# EAGLE board asynclabs_wishield_v2 (EAGLE 5.06)
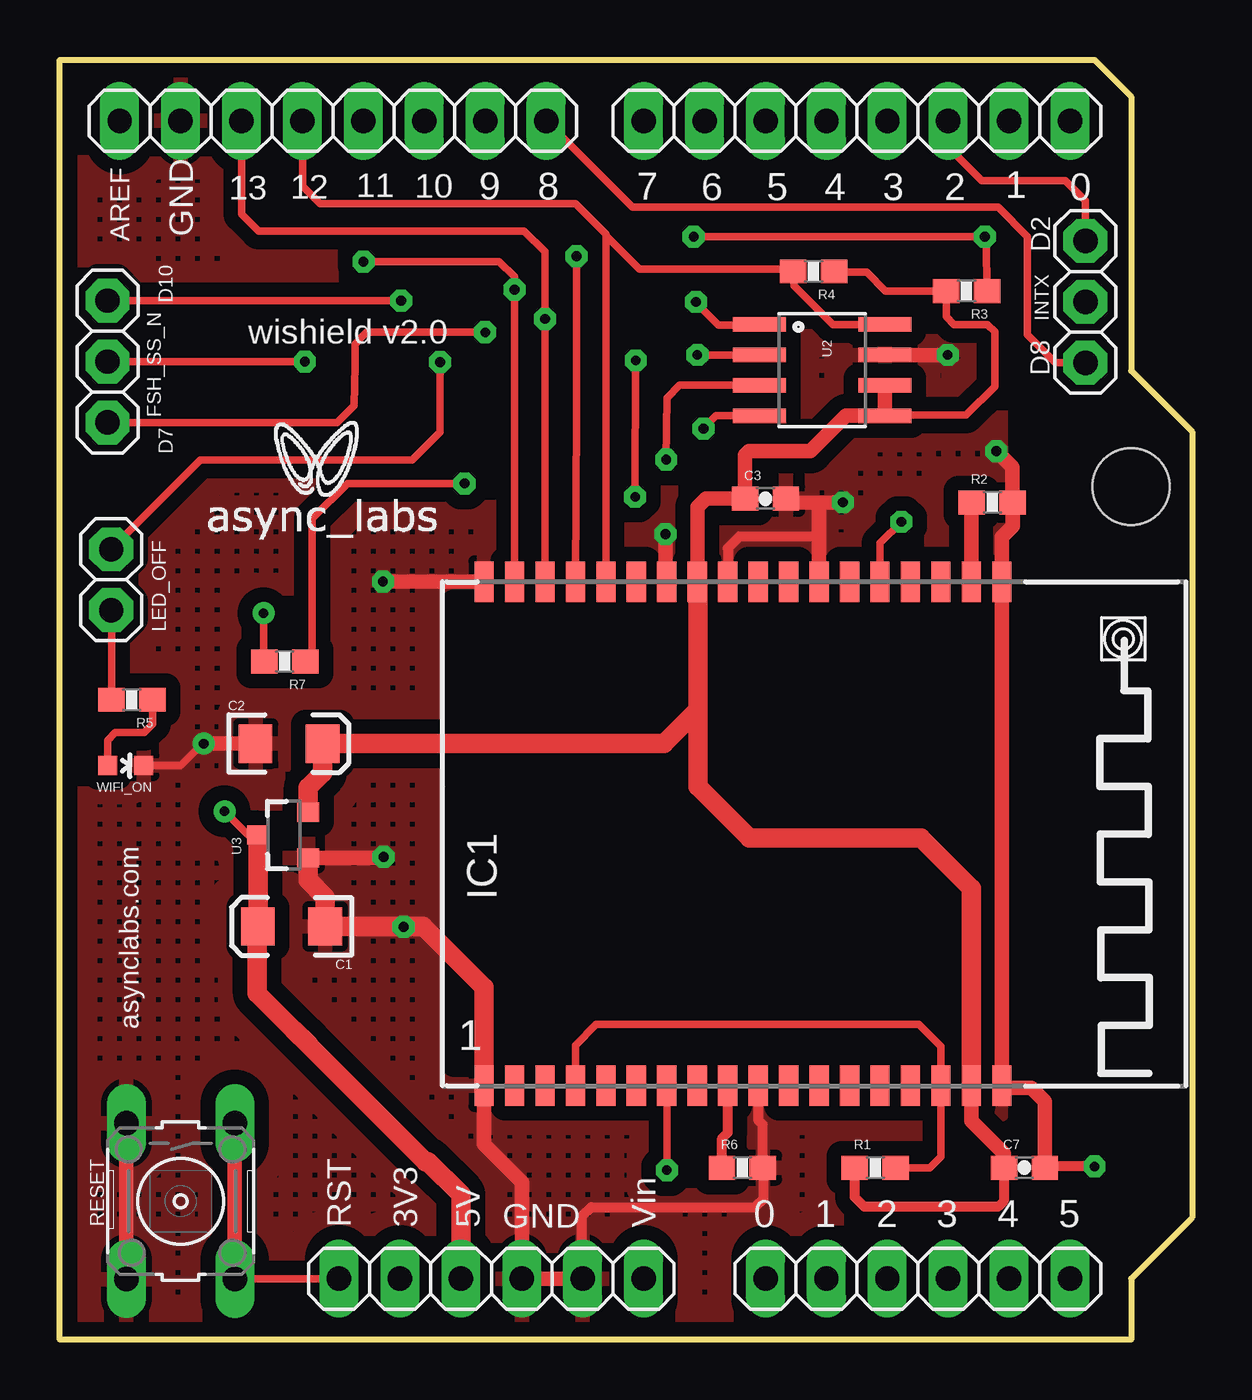
[diagram p0: board, top side]
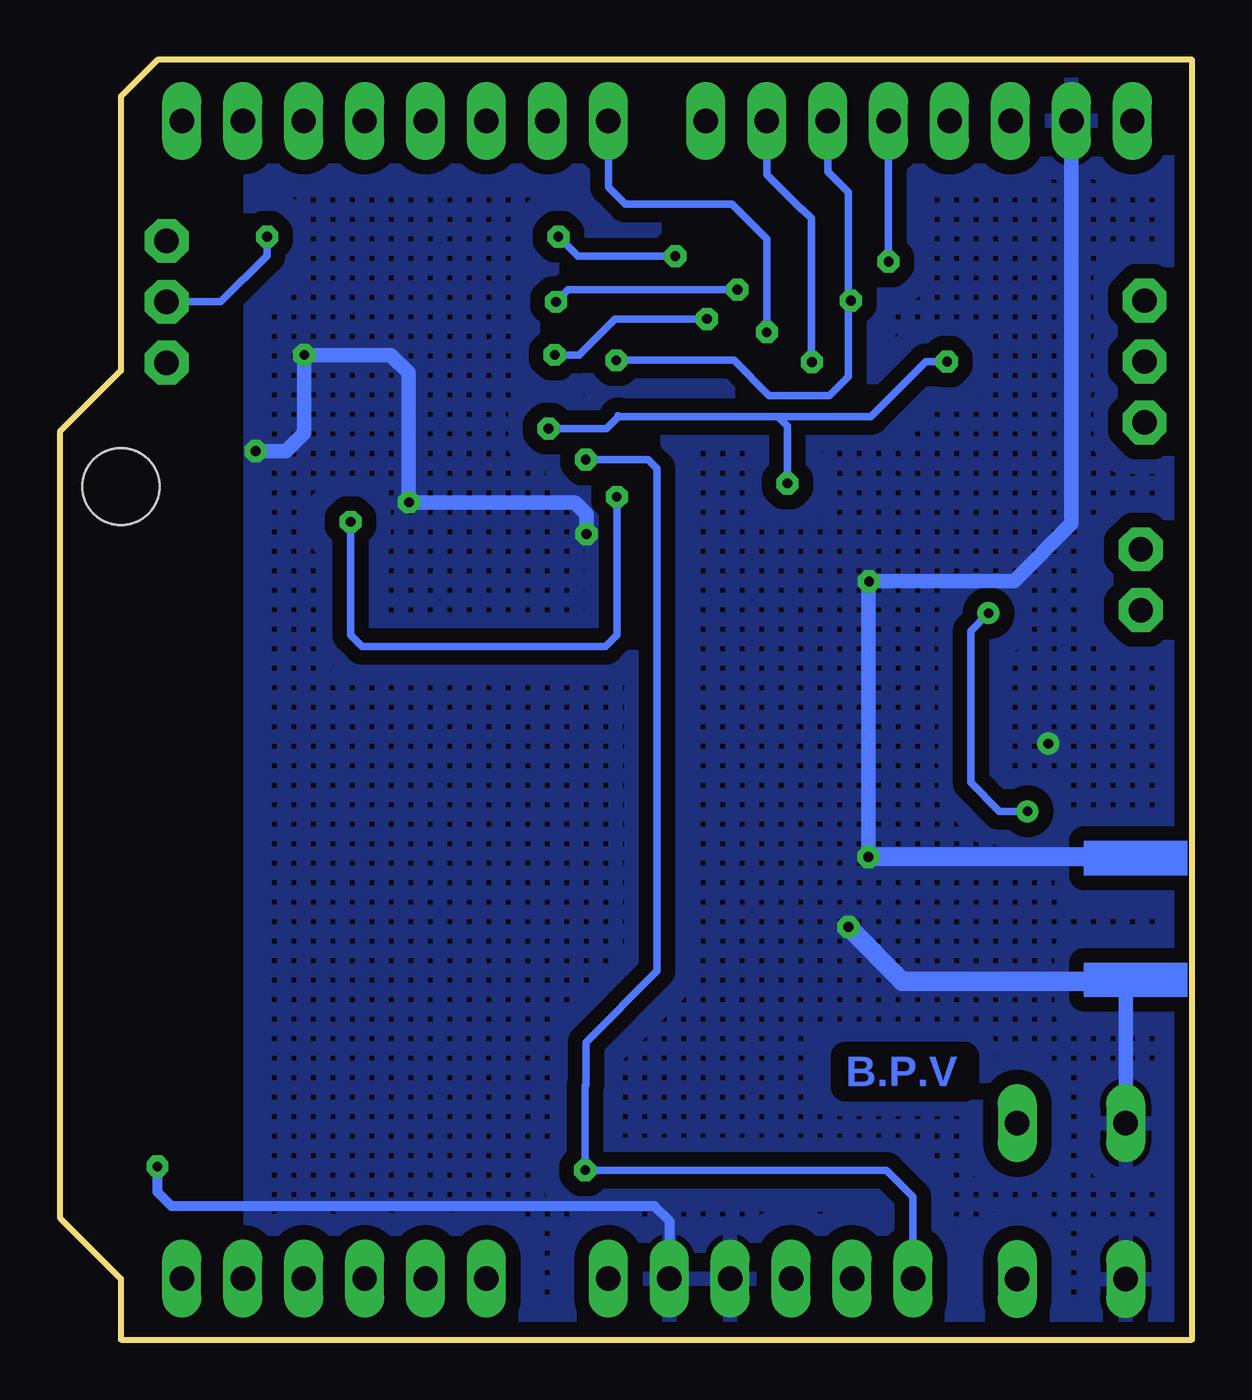
[diagram p1: board, bottom side, seen from below]

Size 47.19 x 53.34 mm. Coordinates in mm from the lower left corner, seen from the top.
Outline: 0,53.34 43.13,53.34 44.65,51.82 44.65,40.39 47.19,37.85 47.19,5.08 44.65,2.54 44.65,0 0,0 0,53.34
Copper layers (1*16): Top 0.035mm / dielectric 1.5mm / Bottom 0.035mm
Design rules "SparkFun *": minimum track width 8mil, minimum drill 16mil, track to track 8mil, track to pad 8mil, pad to pad 8mil, via to via 8mil, smd to smd 8mil, copper to edge 10mil, drill to drill 8mil, minimum pad ring 12mil, minimum via ring 10mil, stop-mask expansion 4mil, vias tented up to drill 25mil, thermal gap 10mil
Holes 3.2 mm at 44.65,35.56
tKeepout: area 39.9,30.7 to 46.8,31.7; area 39.8,10.4 to 46.8,11.5
tRestrict: area 16.5,11.6 to 47.2,30.7

## Footprints (pad centres in the part's own frame; a part is rotated, then mirrored left to right if it is on the bottom)
EIA3216 = smd 1.4 x 1.6: A 1.4,0; C -1.4,0
0603-CAP = smd 1.1 x 1: 1 -0.85,0; 2 0.85,0
ZG2100MOD = smd 0.8 x 1.7: CE_N 6.63,10.12; GND1 -13.69,-10.88; GND10 -2.26,-10.88; GND16 5.36,-10.88; GND18 7.9,-10.88; GND19 7.9,10.12; GND25 0.28,10.12; GND28 -3.53,10.12; GND30 -6.07,10.12; GND36 -13.69,10.12; INTX -9.88,10.12; JRST -3.53,-10.88; NC8 -4.8,-10.88; NC12 0.28,-10.88; NC13 1.55,-10.88; NC14 2.82,-10.88; NC15 4.09,-10.88; NC21 5.36,10.12; NC22 4.09,10.12; RESETN -6.07,-10.88; SCK -11.15,10.12; SDI -12.42,10.12; SDO -8.61,10.12; SS_N 2.82,10.12; TCK -9.88,-10.88; TDI -7.34,-10.88; TDO -11.15,-10.88; TMS -8.61,-10.88; UART_RX -0.99,10.12; UART_TX -2.26,10.12; VDD18_2 -12.42,-10.88; VDD18_11 -0.99,-10.88; VDD18_24 1.55,10.12; VDD18_31 -7.34,10.12; VDD33_17 6.63,-10.88; VDD33_29 -4.8,10.12
PINHD3 = drill 1.016 pad 1.829 octagon: 1 -2.54,0; 2 0,0; 3 2.54,0
PINHD2 = drill 1.016 pad 1.829 octagon: 1 -1.27,0; 2 1.27,0
0603-RES = smd 1.1 x 1: 1 -0.85,0; 2 0.85,0
SWITCH = drill 1.016 long: 1 -3.251,2.261; 2 3.251,2.261; 3 -3.251,-2.261; 4 3.251,-2.261
SO08 = smd 0.61 x 2.21: 1 -1.905,-2.616; 2 -0.635,-2.616; 3 0.635,-2.616; 4 1.905,-2.616; 5 1.905,2.616; 6 0.635,2.616; 7 -0.635,2.616; 8 -1.905,2.616
SOT23-3 = smd 0.8 x 0.9: 1 -0.95,-1; 2 0.95,-1; 3 0,1.1
1X06 = drill 1.016 long: 1 -6.35,0; 2 -3.81,0; 3 -1.27,0; 4 1.27,0; 5 3.81,0; 6 6.35,0
1X08 = drill 1.016 long: 1 -8.89,0; 2 -6.35,0; 3 -3.81,0; 4 -1.27,0; 5 1.27,0; 6 3.81,0; 7 6.35,0; 8 8.89,0
LED-0603 = smd 0.8 x 0.8: A 0,-0.75; C 0,0.75

## Placement (x,y rotation side)
C1  10uF  [EIA3216]  9.65,17.22 180 top
C2  10uF  [EIA3216]  9.55,24.84 0 top
C3  100nF  [0603-CAP]  29.41,35.05 0 top
C7  100nF  [0603-CAP]  40.21,7.16 0 top
IC1  802.11  [ZG2100MOD]  31.37,21.46 0 top
INTX  [PINHD3]  42.75,43.26 90 top
JP3  [PINHD2]  2.13,31.67 270 top
JP4  [PINHD3]  1.98,40.77 270 top
R1  4.7k  [0603-RES]  33.99,7.16 0 top
R2  4.7k  [0603-RES]  38.86,34.9 0 top
R3  4.7k  [0603-RES]  37.8,43.71 180 top
R4  4.7k  [0603-RES]  31.42,44.53 180 top
R5  330  [0603-RES]  3,26.67 180 top
R6  4.7k  [0603-RES]  28.45,7.16 0 top
R7  4.7k  [0603-RES]  9.37,28.27 180 top
RESET  SWITCH  [SWITCH]  5.03,5.77 270 top
U2  [SO08]  31.78,40.41 270 top
U3  MCP1700_SOT23  [SOT23-3]  9.35,21.03 90 top
U$1  POWER  [1X06]  17.98,2.54 0 top
U$2  ANALOG  [1X06]  35.76,2.54 0 top
U$3  DIGITAL_0_7  [1X08]  33.22,50.8 0 top
U$4  DIGITAL_8_13  [1X08]  11.38,50.8 0 top
WIFI_ON  red  [LED-0603]  2.74,23.93 270 top

## Library data of the parts
C1-C3 C7 R1-R7 RESET U2 U3 WIFI_ON = asynlabs
IC1 INTX JP3 JP4 = ZGLIB
U$1-U$4 = arduino

## Nets
+3V3: C2.A C3.1 C7.1 IC1.VDD33_17 IC1.VDD33_29 R1.1 R3.2 R4.1 U2.5 U2.6 U3.2
+5V: C1.A R7.2 U3.3 U$1.3
CE_N: IC1.CE_N R2.1
D2: INTX.3 U$3.6
D7: JP4.3 U$3.1
D8: INTX.1 U$4.8
DIG9: JP3.1 U$4.7
FLASH_SS_N: JP4.2 R7.1 U2.4
GND: C1.C C2.C C3.2 C7.2 IC1.GND1 IC1.GND10 IC1.GND18 IC1.GND19 IC1.GND25 IC1.GND28 IC1.GND30 IC1.GND36 R2.2 R6.2 RESET.3 RESET.4 U2.7 U3.1 U$1.4 U$1.5 U$4.2 WIFI_ON.C
INTX: IC1.INTX INTX.2 R3.1
JRST: IC1.JRST R6.1
N$1: JP3.2 R5.2
N$2: R5.1 WIFI_ON.A
RST: IC1.RESETN RESET.1 RESET.2 U2.3 U$1.1
SCK: IC1.SCK U2.2 U$4.3
SDI: IC1.SDI U2.1 U$4.5
SDO: IC1.SDO R4.2 U2.8 U$4.4
SS_N: IC1.SS_N JP4.1 U$4.6
VDD_TIE: IC1.GND16 IC1.TCK R1.2

## Tracks (layer width: path | path; a pad name or v marks a point on that pad's centre or on a via)
+3V3
  Top 0.305: U2.5 34.42,38.53 37.77,38.53 38.96,39.73 38.96,42.01 38.66,42.32 37.26,42.32 36.95,42.63 R3.2 34.42,43.71 33.63,44.5 32.3,44.5 R4.1
  Top 0.406: R1.1 33.14,5.93 33.53,5.54 39.12,5.54 39.34,5.77 C7.1
  Top 0.61: IC1.VDD33_17 38,9.12 39.36,7.76 C7.1 | 26.59,31.56 IC1.VDD33_29 26.57,34.7 26.92,35.05 C3.1 28.56,36.87 28.73,37.03 31.29,37.03 32.77,38.51 U2.5 U2.6
  Top 0.813: IC1.VDD33_17 38,18.8 35.89,20.9 28.75,20.9 26.59,23.06 26.59,26.26 | 26.59,26.26 26.59,31.56 | 26.59,26.26 25.17,24.84 C2.A 10.95,23.62 10.35,23.02 U3.2
+5V  (via drill 0.41)
  Top 0.203: 8.48,28.25 8.51,28.27 R7.2
  Top 0.305: v8.48,30.28 8.48,28.25 | U3.3 7.85,21.03 v6.86,22.02
  Top 0.813: U$1.3 16.71,6.05 15.34,7.42 15.24,7.42 9.74,12.92 | 9.74,12.92 8.23,14.43 8.23,17.2 C1.A U3.3 | 9.74,12.92 10.36,12.29
  Bottom 0.305: v6.86,22.02 8.03,22.02 9.22,23.22 9.22,29.54 v8.48,30.28
CE_N
  Top 0.61: IC1.CE_N 38,34.89 R2.1
D2
  Top 0.305: 37.03,49.71 38.43,48.31 41.91,48.31 42.75,47.47 INTX.3
  Top 0.61: 37.03,49.71 U$3.6
D7  (via drill 0.41)
  Top 0.305: JP4.3 11.56,38.23 12.27,38.94 12.29,40.61 12.29,41.5 12.78,41.99 v17.73,41.99
  Bottom 0.305: 24.33,49.71 24.33,49.23 | 24.33,49.71 U$3.1 | 24.33,49.71 24.33,48.03 23.62,47.32 19.18,47.32 17.73,45.87 v17.73,41.99
D8
  Top 0.305: INTX.1 41.5,40.72 40.34,41.88 40.34,45.97 39.12,47.19 23.88,47.19 U$4.8
DIG9  (via drill 0.41)
  Top 0.305: v15.85,40.74 15.85,37.82 14.68,36.65 5.84,36.65 JP3.1
  Bottom 0.305: U$4.7 17.73,48.57 16.28,47.12 16.26,47.12 15.88,46.74 15.88,40.77 v15.85,40.74
FLASH_SS_N  (via drill 0.41)
  Top 0.203: 10.52,28.55 10.24,28.27 R7.1
  Top 0.305: v10.21,40.77 JP4.2 | U2.4 27.36,38.51 v26.82,37.97 | 10.52,28.55 10.52,34.21 11.99,35.69 v16.87,35.69
  Bottom 0.305: v10.21,40.77 11.1,40.77 13.39,38.48 17.27,38.48 | 17.27,38.48 23.9,38.48 | 23.9,38.48 23.93,38.51 | v26.82,37.97 24.41,37.97 23.9,38.48 | v16.87,35.69 16.87,38.07 17.27,38.48
GND  (via drill 0.41)
  Top 0.305: WIFI_ON.C 5.03,23.93 5.97,24.87 8.13,24.87 C2.C | v13.46,31.6 13.44,31.62
  Top 0.406: R6.2 29.3,8.95 29.11,9.14 IC1.GND10 | 29.34,7.12 29.34,5.87 28.98,5.51 22.15,5.51 21.77,5.13 21.77,2.57 | IC1.GND18 40.45,10.58 41.05,9.98 41.05,7.21 v43.13,7.21 | IC1.GND30 | IC1.GND28 27.84,32.99 28.32,33.48 31.44,33.48 31.65,33.17
  Top 0.61: IC1.GND10 | C7.2 41.06,9.92 40.49,10.49 39.36,10.49 IC1.GND18 IC1.GND19 39.27,33.45 39.73,33.91 39.73,34.89 R2.2 39.71,36.36 v39.04,37.03 | 29.34,7.12 R6.2 | 21.77,2.57 U$1.5 U$1.4 19.25,6.55 17.68,8.13 IC1.GND1 | RESET.4 RESET.3 | 31.65,34.9 31.65,33.17 IC1.GND25 | 31.65,34.9 | 31.52,34.9 31.65,34.9 | 31.52,34.9 30.26,34.9 C3.2 | v37.01,41.05 U2.7 | v32.64,34.9 31.52,34.9 | 12.42,17.22 14.22,17.22 | U3.1 13.45,20.08 v13.49,20.12 | v13.46,31.6 17.66,31.6 IC1.GND36 | C2.C v5.99,24.84 | v25.25,33.58 25.25,31.63 IC1.GND30 | v14.33,17.2 14.53,17.2 14.55,17.22
  Top 0.813: 12.42,17.22 C1.C 11.05,18.44 10.34,19.15 U3.1 | 12.42,17.22 14.1,17.22 | IC1.GND1 17.68,14.68 15.14,17.22 14.55,17.22 12.42,17.22
  Bottom 0.406: v43.13,7.21 43.13,6.15 42.55,5.56 22.4,5.56 21.77,4.93 21.77,2.57 U$1.5
  Bottom 0.61: U$1.5 21.77,2.54 | v39.04,37.03 37.77,37.03 37.01,37.8 v37.01,41.05 33.4,41.05 32.66,40.31 32.66,34.93 v32.64,34.9 25.73,34.9 25.25,34.42 v25.25,33.58 | v13.49,20.12 13.49,31.57 v13.46,31.6 13.44,31.62 7.42,31.62 5.03,34.01 U$4.2 | RESET.3 2.77,14.94
  Bottom 0.813: v13.49,20.12 3.15,20.14 | 2.77,14.94 12.07,14.94 v14.33,17.2
  pour Bottom (isolate 0.61, hatched): 0.08,53.39 39.24,53.39 39.24,0.1 0.08,0.1 0.08,2.26 0,2.26 0,53.47
  pour Top (isolate 0.61, hatched): 0.05,53.37 39.22,53.37 39.22,0.08 0.05,0.08 0.05,2.24 -0.03,2.24 -0.03,53.44
INTX  (via drill 0.41)
  Top 0.305: IC1.INTX 21.54,38.61 v21.54,45.16 | R3.1 38.62,45.71 v38.56,45.97 v26.42,45.97
  Bottom 0.305: v21.54,45.16 25.6,45.16 v26.42,45.97 | v38.56,45.97 38.56,45.19 40.49,43.26 INTX.2
JRST
  Top 0.406: R6.1 27.6,8.4 27.84,8.64 IC1.JRST
  Top 0.61: IC1.JRST
N$1
  Top 0.305: R5.2 2.15,30.39 JP3.2
N$2
  Top 0.305: WIFI_ON.A 1.99,24.98 2.31,25.3 3.51,25.3 3.86,25.65 3.86,26.66 R5.1
RST  (via drill 0.41)
  Top 0.305: U$1.1 7.32,2.54 RESET.2 | v25.3,7.06 IC1.RESETN | v25.27,36.68 25.3,39.24 25.83,39.78 U2.3 | 29.34,39.78 29.97,39.78 30,39.8
  Top 0.406: U2.3 29.34,39.78
  Top 0.61: RESET.2 RESET.1
  Bottom 0.305: U$1.1 11.63,5.94 12.75,7.06 v25.3,7.06 | v25.3,7.06 25.3,10.59 | v25.3,7.06 IC1.RESETN 25.27,10.61 25.27,12.4 22.3,15.37 22.3,36.3 22.68,36.68 v25.27,36.68
SCK  (via drill 0.41)
  Top 0.305: IC1.SCK v20.22,42.55 20.22,45.34 19.36,46.2 8.28,46.2 7.57,46.91 U$4.3 | v26.57,41.05 U2.2
  Bottom 0.305: v20.22,42.55 24.05,42.55 25.55,41.05 v26.57,41.05
SDI  (via drill 0.41)
  Top 0.305: IC1.SDI 18.95,44.3 | 18.95,44.3 18.31,44.93 v12.65,44.93 | 18.95,44.3 v18.95,43.77 v18.95,43.76 | v26.52,43.26 26.52,43.23 27.46,42.29 29.13,42.29 U2.1
  Bottom 0.305: v12.65,44.93 U$4.5 | v18.95,43.76 26.01,43.76 v26.52,43.26
SDO
  Top 0.305: IC1.SDO 22.76,46.08 | 22.76,46.08 21.49,47.35 10.85,47.35 10.11,48.08 U$4.4 | 22.76,46.08 22.76,46.03 24.16,44.63 30.71,44.63 | U2.8 32.23,42.32 30.61,43.94 30.61,44.49 R4.2
  Top 0.406: 30.71,44.63 30.57,44.63 R4.2
SS_N  (via drill 0.41)
  Top 0.305: JP4.1 v14.22,43.31 | v24,40.82 v23.98,35.13 | IC1.SS_N 34.19,33.2 v35.08,34.09
  Bottom 0.305: U$4.6 15.19,48.69 14.33,47.83 14.33,43.41 | v14.22,43.31 14.33,43.41 | 14.33,43.41 14.33,40.13 15.11,39.34 17.63,39.34 19.1,40.82 v24,40.82 | v35.08,34.09 35.08,29.36 34.6,28.88 24.46,28.88 23.98,29.36 v23.98,35.13
VDD_TIE
  Top 0.305: IC1.TCK 21.49,12.27 22.35,13.13 35.81,13.13 36.73,12.22 IC1.GND16 36.73,7.62 36.27,7.16 R1.2
(copper drawn outside any net)
  shapes: Bottom area x2

## Text on the board
Bottom: B.P.V
tNames: 13 | 12 | 11 | 10 | 9 | 8 | 6 | 5 | 4 | 3 | 2 | 1 | 0 | 7 | AREF | GND | D2 | D10 | wishield v2.0 | D8 | FSH_SS_N | D7 | LED_OFF | asynclabs.com | GND | RST | 3V3 | 5V | Vin | 0 | 1 | 2 | 3 | 4 | 5